# EAGLE board teensy36-test-harness (EAGLE 7.7.0)
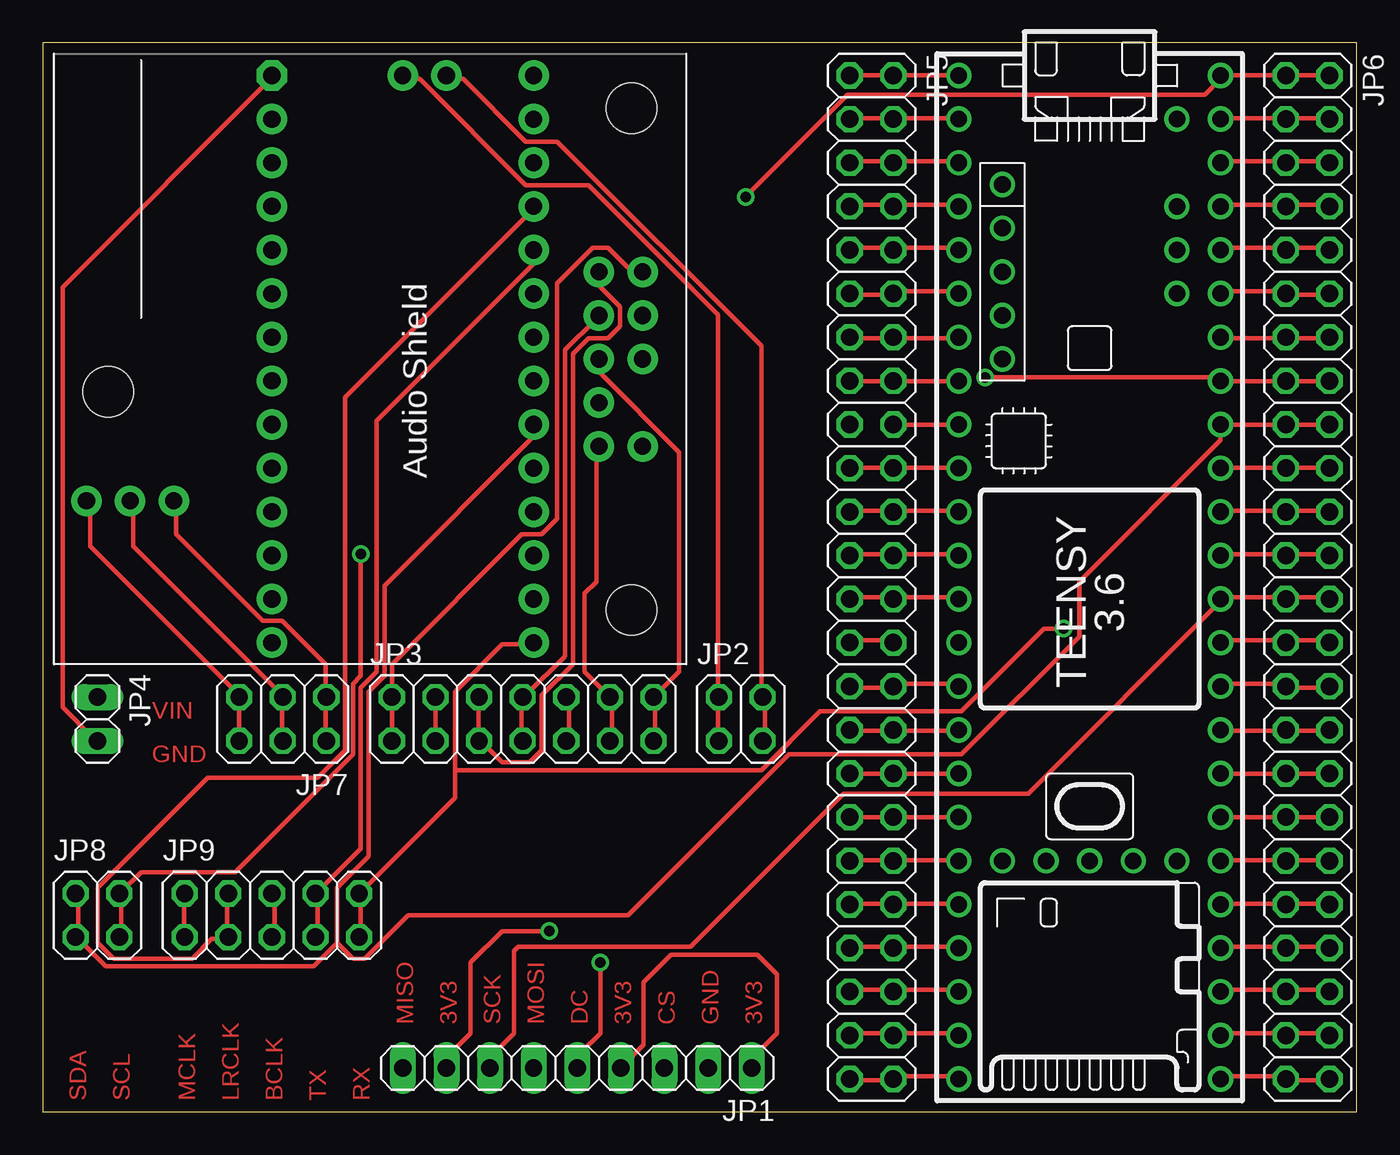
[diagram p0: board, top side]
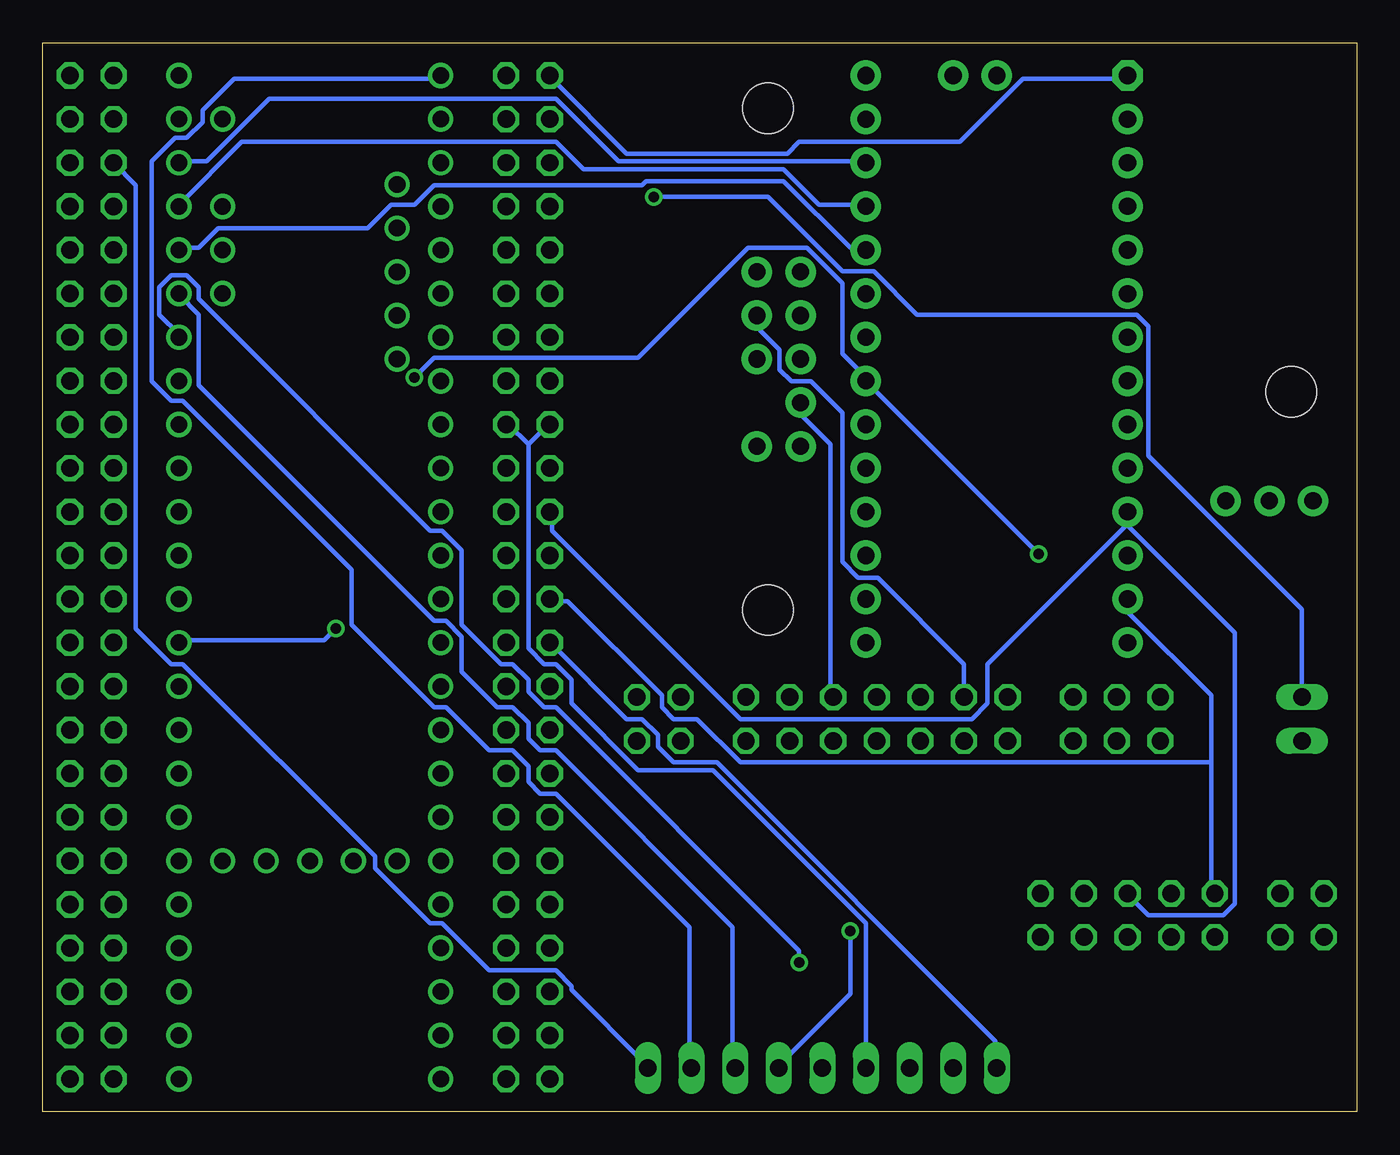
[diagram p1: board, bottom side, seen from below]

Size 76.5 x 62.22 mm. Coordinates in mm from the lower left corner, seen from the top.
Outline: 0,0 76.5,0 76.5,62.22 0,62.22 0,0
Copper layers (1*16): Top 0.035mm / dielectric 1.5mm / Bottom 0.035mm
Design rules "default": minimum track width 10mil, minimum drill 24mil, track to track 8mil, track to pad 8mil, pad to pad 8mil, via to via 8mil, smd to smd 8mil, copper to edge 40mil, drill to drill 8mil, minimum pad ring 10mil, minimum via ring 8mil, stop-mask expansion 4mil, vias tented up to drill 0mil, thermal gap 10mil

## Footprints (pad centres in the part's own frame; a part is rotated, then mirrored left to right if it is on the bottom)
1X09 = drill 1.016 long: 1 -10.16,0; 2 -7.62,0; 3 -5.08,0; 4 -2.54,0; 5 0,0; 6 2.54,0; 7 5.08,0; 8 7.62,0; 9 10.16,0
2X02 = drill 1.016 octagon: 1 -1.27,-1.27; 2 -1.27,1.27; 3 1.27,-1.27; 4 1.27,1.27
2X07 = drill 1.016 octagon: 1 -7.62,-1.27; 2 -7.62,1.27; 3 -5.08,-1.27; 4 -5.08,1.27; 5 -2.54,-1.27; 6 -2.54,1.27; 7 0,-1.27; 8 0,1.27; 9 2.54,-1.27; 10 2.54,1.27; 11 5.08,-1.27; 12 5.08,1.27; 13 7.62,-1.27; 14 7.62,1.27
1X02 = drill 1.016 long: 1 -1.27,0; 2 1.27,0
2X24 = drill 1.016 octagon: 1 -27.94,-1.27; 2 -27.94,1.27; 3 -25.4,-1.27; 4 -25.4,1.27; 5 -22.86,-1.27; 6 -22.86,1.27; 7 -20.32,-1.27; 8 -20.32,1.27; 9 -17.78,-1.27; 10 -17.78,1.27; 11 -15.24,-1.27; 12 -15.24,1.27; 13 -12.7,-1.27; 14 -12.7,1.27; 15 -10.16,-1.27; 16 -10.16,1.27; 17 -7.62,-1.27; 18 -7.62,1.27; 19 -5.08,-1.27; 20 -5.08,1.27; 21 -2.54,-1.27; 22 -2.54,1.27; 23 0,-1.27; 24 0,1.27; 25 2.54,-1.27; 26 2.54,1.27; 27 5.08,-1.27; 28 5.08,1.27; 29 7.62,-1.27; 30 7.62,1.27; 31 10.16,-1.27; 32 10.16,1.27; 33 12.7,-1.27; 34 12.7,1.27; 35 15.24,-1.27; 36 15.24,1.27; 37 17.78,-1.27; 38 17.78,1.27; 39 20.32,-1.27; 40 20.32,1.27; 41 22.86,-1.27; 42 22.86,1.27; 43 25.4,-1.27; 44 25.4,1.27; 45 27.94,-1.27; 46 27.94,1.27; 47 30.48,-1.27; 48 30.48,1.27
2X03 = drill 1.016 octagon: 1 -2.54,-1.27; 2 -2.54,1.27; 3 0,-1.27; 4 0,1.27; 5 2.54,-1.27; 6 2.54,1.27
2X05 = drill 1.016 octagon: 1 -5.08,-1.27; 2 -5.08,1.27; 3 -2.54,-1.27; 4 -2.54,1.27; 5 0,-1.27; 6 0,1.27; 7 2.54,-1.27; 8 2.54,1.27; 9 5.08,-1.27; 10 5.08,1.27
AUDIOSHIELD = drill 1 pad 1.778: 0 -13.97,-5.08; 1 -11.43,-5.08; 2 -8.89,-5.08; 3 -6.35,-5.08; 3V -11.43,10.16; 4 -3.81,-5.08; 5 -1.27,-5.08; 5V -16.51,10.16; 6 1.27,-5.08; 7 3.81,-5.08; 8 6.35,-5.08; 9 8.89,-5.08; 10 11.43,-5.08; 11 13.97,-5.08; 12 16.51,-5.08; 13 16.51,10.16; 14 13.97,10.16; 15 11.43,10.16; 16 8.89,10.16; 17 6.35,10.16; 18 3.81,10.16; 19 1.27,10.16; 20 -1.27,10.16; 21 -3.81,10.16; 22 -6.35,10.16; 23 -8.89,10.16; G -13.97,10.16; GND_MIC -16.51,2.54; INGND1 -5.08,16.51; INGND2 -2.54,16.51; INL -5.08,13.97; INR -2.54,13.97; MIC -16.51,5.08; OUTGND 2.54,13.97; OUTL 5.08,13.97; OUTR 0,13.97; UNUSED1 0,16.51; UNUSED2 5.08,16.51; VOL 8.255,-13.335; VOL_3.3V 8.255,-15.875; VOL_GND 8.255,-10.795 | drill 1 pad 1.778 octagon: GND -16.51,-5.08 | hole 2.921: 1.905,-14.605; -14.605,15.875; 14.605,15.875
TEENSY_3.5/3.6 = drill 0.965: 0/RX -25.4,-7.62; 1/TX -22.86,-7.62; 2 -20.32,-7.62; 3/CANTX -17.78,-7.62; 3V3 7.62,-7.62; 3V3_2 17.78,-2.54; 3V3_LO -22.86,7.62; 4/CANRX -15.24,-7.62; 5 -12.7,-7.62; 6 -10.16,-7.62; 7 -7.62,-7.62; 8 -5.08,-7.62; 9/CS -2.54,-7.62; 10/CS 0,-7.62; 11/MOSI 2.54,-7.62; 12/MISO 5.08,-7.62; 13/SCK 5.08,7.62; 14/A0 2.54,7.62; 15/A1 0,7.62; 16/A2 -2.54,7.62; 17/A3 -5.08,7.62; 18/A4/SDA -7.62,7.62; 19/A5/SCL -10.16,7.62; 20/A6 -12.7,7.62; 21/A7 -15.24,7.62; 21/DAC0 12.7,7.62; 22/A8 -17.78,7.62; 23/A9 -20.32,7.62; 24 10.16,-7.62; 25 12.7,-7.62; 26 15.24,-7.62; 27 17.78,-7.62; 28 20.32,-7.62; 29 22.86,-7.62; 30 25.4,-7.62; 31/A12 27.94,-7.62; 32/A13 30.48,-7.62; 33/A14 30.48,7.62; 34/A15 27.94,7.62; 35/A16 25.4,7.62; 36/A17 22.86,7.62; 37/A18 20.32,7.62; 38/A19 17.78,7.62; 39/A20 15.24,7.62; A10 -17.78,5.08; A11 -15.24,5.08; A22/DAC1 10.16,7.62; AGND -25.4,7.62; AREF -20.32,5.08; GND -27.94,-7.62; GND2 7.62,7.62; GND3 17.78,0; PROG 17.78,2.54; RESET 17.78,5.08; U5V -21.59,-5.08; UD+ -16.51,-5.08; UD- -19.05,-5.08; UGND1 -13.97,-5.08; UGND2 -11.43,-5.08; VBAT 17.78,-5.08; VIN -27.94,7.62; VUSB -25.4,5.08

## Placement (x,y rotation side)
JP1  [1X09]  31.11,2.54 180 top
JP2  [2X02]  40.64,22.86 0 top
JP3  [2X07]  27.94,22.86 0 top
JP4  [1X02]  3.17,22.86 270 top
JP5  [2X24]  48.26,32.39 270 top
JP6  [2X24]  73.66,32.39 270 top
JP7  [2X03]  13.97,22.86 180 top
JP8  [2X02]  3.17,11.43 0 top
JP9  [2X05]  13.34,11.43 0 top
U$2  [AUDIOSHIELD]  18.41,43.81 270 top
U$3  TEENSY_3.5/3.6  [TEENSY_3.5/3.6]  60.96,32.39 270 top

## Library data of the parts
JP1-JP9 = pinhead
U$2 = Teensy_Audioshield
U$3 = JC_Teensy356

## Nets
3V3: JP1.1 JP1.4 JP1.8 JP6.5 JP6.6 U$2.3V U$3.3V3_LO
BCLK: JP5.21 JP5.22 JP9.5 JP9.6 U$2.9 U$3.9/CS
GND: JP1.2 JP4.2 JP5.1 JP5.2 U$2.GND U$3.GND
LRCLK: JP6.7 JP6.8 JP9.3 JP9.4 U$2.23 U$3.23/A9
MCLK: JP5.25 JP5.26 JP9.1 JP9.2 U$2.11 U$3.11/MOSI
N$1: JP2.1 JP2.2 U$2.GND_MIC
N$2: JP4.1 JP6.1 JP6.2 U$3.VIN
N$3: JP7.1 JP7.2 U$2.VOL_GND
N$4: JP5.3 JP5.4 U$3.0/RX
N$5: JP5.5 JP5.6 U$3.1/TX
N$6: JP5.7 JP5.8 U$3.2
N$7: JP5.9 JP5.10 U$3.3/CANTX
N$8: JP5.11 JP5.12 U$3.4/CANRX
N$9: JP5.13 JP5.14 U$3.5
N$10: JP2.3 JP2.4 U$2.MIC
N$11: JP3.1 JP3.2 U$2.INGND1
N$12: JP3.3 JP3.4 U$2.INGND2
N$13: JP3.5 JP3.6 U$2.INL
N$14: JP3.7 JP3.8 U$2.INR
N$15: JP3.9 JP3.10 U$2.OUTGND
N$16: JP3.11 JP3.12 U$2.OUTL
N$17: JP3.13 JP3.14 U$2.OUTR
N$18: JP5.15 JP5.16 U$3.6
N$19: JP7.3 JP7.4 U$2.VOL
N$20: JP5.19 JP5.20 U$3.8
N$21: JP7.5 JP7.6 U$2.VOL_3.3V
N$22: JP5.23 JP5.24 U$3.10/CS
N$25: JP5.29 JP5.30 U$3.3V3
N$26: JP5.31 JP5.32 U$3.24
N$27: JP5.33 JP5.34 U$3.25
N$28: JP5.35 JP5.36 U$3.26
N$29: JP5.37 JP5.38 U$3.27
N$30: JP5.39 JP5.40 U$3.28
N$31: JP5.41 JP5.42 U$3.29
N$32: JP5.43 JP5.44 U$3.30
N$33: JP5.45 JP5.46 U$3.31/A12
N$34: JP5.47 JP5.48 U$3.32/A13
N$36: JP6.3 JP6.4 U$3.AGND
N$44: JP6.19 JP6.20 U$3.17/A3
N$45: JP6.21 JP6.22 U$3.16/A2
N$46: JP6.23 JP6.24 U$3.15/A1
N$49: JP6.29 JP6.30 U$3.GND2
N$50: JP6.31 JP6.32 U$3.A22/DAC1
N$51: JP6.33 JP6.34 U$3.21/DAC0
N$52: JP6.35 JP6.36 U$3.39/A20
N$53: JP6.37 JP6.38 U$3.38/A19
N$54: JP6.39 JP6.40 U$3.37/A18
N$55: JP6.41 JP6.42 U$3.36/A17
N$56: JP6.43 JP6.44 U$3.35/A16
N$57: JP6.45 JP6.46 U$3.34/A15
N$58: JP6.47 JP6.48 U$3.33/A14
RX: JP6.27 JP6.28 JP9.9 JP9.10 U$2.13 U$3.13/SCK
SCL: JP6.15 JP6.16 JP8.3 JP8.4 U$2.19 U$3.19/A5/SCL
SDA: JP6.17 JP6.18 JP8.1 JP8.2 U$2.18 U$3.18/A4/SDA
TFT_CS: JP1.3 JP6.11 JP6.12 U$3.21/A7
TFT_DC: JP1.5 JP6.13 JP6.14 U$3.20/A6
TFT_MISO: JP1.9 JP5.27 JP5.28
TFT_MOSI: JP1.6 JP5.17 JP5.18 U$3.7
TFT_SCK: JP1.7 JP6.25 JP6.26 U$3.14/A0
TX: JP6.9 JP6.10 JP9.7 JP9.8 U$2.22 U$3.22/A8

## Tracks (layer width: path | path; a pad name or v marks a point on that pad's centre or on a via)
3V3  (via drill 0.61)
  Top 0.254: v29.49,10.52 26.75,10.52 24.92,8.69 24.92,4.57 23.55,3.2 23.55,2.74 JP1.8 | JP1.1 41.38,2.74 41.38,3.2 42.75,4.57 42.75,8 41.6,9.14 36.58,9.14 34.98,7.54 34.98,3.89 33.83,2.74 JP1.4 | U$3.3V3_LO 68.58,55.32 72.24,55.32 JP6.5 72.47,55.32 74.75,55.32 JP6.6
  Bottom 0.254: v29.49,10.52 29.49,6.86 33.6,2.74 JP1.4 | U$2.3V 28.57,55.32 42.98,55.32 46.63,58.98 63.32,58.98 66.98,55.32 68.58,55.32 U$3.3V3_LO | JP6.5 71.09,53.95 71.09,28.12 69.04,26.06 68.35,26.06 57.15,14.86 57.15,14.17 53.95,10.97 53.26,10.97 50.52,8.23 46.63,8.23 45.72,7.32 45.72,7.09 41.38,2.74 JP1.1
BCLK
  Top 0.254: U$3.9/CS 53.26,34.98 49.61,34.98 JP5.22 49.38,34.98 47.09,34.98 JP5.21 | JP9.5 13.49,10.29 13.49,12.57 JP9.6
  Bottom 0.254: 13.26,34.29 13.26,34.06 7.09,27.89 7.09,12.12 7.77,11.43 12.12,11.43 13.26,12.57 JP9.6 | 13.26,34.29 13.26,34.75 U$2.9 13.26,34.29 | 13.26,34.29 21.49,26.06 21.49,23.77 22.4,22.86 35.89,22.86 46.86,33.83 46.86,34.75 JP5.21
GND
  Top 0.254: JP4.2 2.97,21.72 1.14,23.55 1.14,48.01 13.26,60.12 U$2.GND | U$3.GND 53.26,60.35 49.61,60.35 JP5.2 49.38,60.35 47.09,60.35 JP5.1
  Bottom 0.254: JP1.2 38.86,2.74 38.86,10.74 46.63,18.52 47.55,18.52 48.23,19.2 48.23,20.12 49.15,21.03 50.52,21.03 53.03,23.55 53.72,23.55 58.52,28.35 58.52,31.55 68.35,41.38 69.04,41.38 70.18,42.52 70.18,55.32 68.81,56.69 68.12,56.69 67.21,57.61 67.21,58.29 65.38,60.12 53.49,60.12 U$3.GND | U$2.GND 13.49,60.12 19.43,60.12 23.09,56.46 32.46,56.46 33.15,55.78 42.52,55.78 46.86,60.12 JP5.1
LRCLK
  Top 0.254: JP9.4 10.74,12.57 10.74,10.29 JP9.3 10.74,10.06 9.83,10.06 8.69,8.91 4.12,8.91 3.2,9.83 3.2,13.03 9.6,19.43 16,19.43 17.6,21.03 17.6,41.61 28.57,52.58 U$2.23 | U$3.23/A9 68.58,52.81 72.24,52.81 JP6.7 72.47,52.81 74.75,52.81 JP6.8
  Bottom 0.254: U$2.23 28.57,52.81 31.32,52.81 33.38,54.86 45.03,54.86 46.63,56.46 64.92,56.46 68.58,52.81 U$3.23/A9
MCLK
  Top 0.254: U$3.11/MOSI 53.26,29.95 49.61,29.95 JP5.26 49.38,29.95 47.09,29.95 JP5.25 | JP9.1 8.23,10.29 8.23,12.57 JP9.2
  Bottom 0.254: 8.46,20.35 8.46,12.8 JP9.2 | 8.46,20.35 8.46,24.23 13.26,29.03 13.26,29.72 U$2.11 | 8.46,20.35 35.89,20.35 38.41,22.86 39.78,22.86 40.46,23.55 40.46,24.23 45.95,29.72 46.86,29.72 JP5.25
N$1
  Top 0.254: JP2.1 39.32,21.72 39.32,24 JP2.2 39.32,24.23 39.32,46.41 31.77,53.95 28.12,53.95 21.95,60.12 21.03,60.12 U$2.GND_MIC
N$2  (via drill 0.61)
  Top 0.254: v40.92,53.26 46.86,59.21 67.67,59.21 68.58,60.12 U$3.VIN 68.58,60.35 72.24,60.35 JP6.1 72.47,60.35 74.75,60.35 JP6.2
  Bottom 0.254: v40.92,53.26 34.29,53.26 29.95,48.92 28.12,48.92 25.6,46.41 12.8,46.41 12.12,45.72 12.12,38.18 3.2,29.26 3.2,24.23 JP4.1
N$3
  Top 0.254: JP7.2 16.46,21.72 16.46,24 JP7.1 16.46,24.23 16.46,26.06 13.95,28.57 12.8,28.57 7.77,33.6 7.77,35.43 U$2.VOL_GND
N$4
  Top 0.254: U$3.0/RX 53.26,57.84 49.61,57.84 JP5.4 49.38,57.84 47.09,57.84 JP5.3
N$5
  Top 0.254: U$3.1/TX 53.26,55.32 49.61,55.32 JP5.6 49.38,55.32 47.09,55.32 JP5.5
N$6
  Top 0.254: U$3.2 53.26,52.81 49.61,52.81 JP5.8 49.38,52.81 47.09,52.81 JP5.7
N$7
  Top 0.254: U$3.3/CANTX 53.26,50.29 49.61,50.29 JP5.10 49.38,50.29 47.09,50.29 JP5.9
N$8
  Top 0.254: U$3.4/CANRX 53.26,47.78 49.61,47.78 JP5.12 49.38,47.55 47.09,47.55 JP5.11
N$9
  Top 0.254: U$3.5 53.26,45.03 49.61,45.03 JP5.14 49.38,45.03 47.09,45.03 JP5.13
N$10
  Top 0.254: JP2.3 42.06,21.72 42.06,24 JP2.4 41.83,24.23 41.83,44.58 29.95,56.46 28.12,56.46 24.46,60.12 23.55,60.12 U$2.MIC
N$11
  Top 0.254: JP3.1 20.34,21.72 20.34,24 JP3.2 20.34,24.23 20.34,26.06 27.89,33.6 29.03,33.6 29.95,34.52 29.95,48.23 32,50.29 32.92,50.29 34.29,48.92 34.75,48.92 U$2.INGND1
N$12
  Top 0.254: JP3.4 JP3.3
  Bottom 0.254: JP3.4 22.86,26.06 27.89,31.09 29.03,31.09 29.95,32 29.95,40.69 31.77,42.52 32.92,42.52 33.6,43.2 33.6,44.35 34.75,45.49 34.75,46.18 U$2.INGND2
N$13
  Top 0.254: JP3.6 25.38,24 25.38,21.72 JP3.5 25.6,21.49 26.75,20.35 28.35,20.35 29.03,21.03 29.03,24.23 30.86,26.06 30.86,44.12 31.77,45.03 32.92,45.03 33.6,45.72 33.6,46.86 32.46,48.01 32.46,48.69 U$2.INL
N$14
  Top 0.254: JP3.7 27.89,21.72 27.89,24 JP3.8 28.12,24.23 30.4,26.52 30.4,44.35 32.23,46.18 U$2.INR
N$15
  Top 0.254: JP3.9 30.63,21.72 30.63,24 JP3.10
  Bottom 0.254: U$2.OUTGND 32.23,41.15 32.23,40.46 30.63,38.86 30.63,24.23 JP3.10
N$16
  Top 0.254: JP3.11 33.15,21.72 33.15,24 JP3.12 31.55,25.6 31.55,30.18 32.23,30.86 32.23,38.63 U$2.OUTL
N$17
  Top 0.254: JP3.13 35.66,21.72 35.66,24 JP3.14 37.03,25.6 37.03,38.41 32.46,42.98 32.46,43.66 U$2.OUTR
N$18
  Top 0.254: U$3.6 53.26,42.52 49.61,42.52 JP5.16 49.38,42.52 47.09,42.52 JP5.15
N$19
  Top 0.254: JP7.4 13.95,21.72 13.95,24 JP7.3 13.95,24.23 5.26,32.92 5.26,35.43 U$2.VOL
N$20
  Top 0.254: U$3.8 53.26,37.49 49.61,37.49 JP5.20 49.38,37.49 47.09,37.49 JP5.19
N$21
  Top 0.254: JP7.6 JP7.5 11.43,24.23 2.74,32.92 2.74,35.43 U$2.VOL_3.3V
N$22
  Top 0.254: U$3.10/CS 53.26,32.46 49.61,32.46 JP5.24 49.38,32.46 47.09,32.46 JP5.23
N$25
  Top 0.254: U$3.3V3 53.26,24.92 49.61,24.92 JP5.30 49.38,24.69 47.09,24.69 JP5.29
N$26
  Top 0.254: U$3.24 53.26,22.17 49.61,22.17 JP5.32 49.38,22.17 47.09,22.17 JP5.31
N$27
  Top 0.254: U$3.25 53.26,19.66 49.61,19.66 JP5.34 49.38,19.66 47.09,19.66 JP5.33
N$28
  Top 0.254: U$3.26 JP5.36 JP5.35
N$29
  Top 0.254: U$3.27 53.26,14.63 49.61,14.63 JP5.38 49.38,14.63 47.09,14.63 JP5.37
N$30
  Top 0.254: U$3.28 53.26,12.12 49.61,12.12 JP5.40 49.38,12.12 47.09,12.12 JP5.39
N$31
  Top 0.254: U$3.29 53.26,9.6 49.61,9.6 JP5.42 49.38,9.6 47.09,9.6 JP5.41
N$32
  Top 0.254: U$3.30 53.26,7.09 49.61,7.09 JP5.44 49.38,7.09 47.09,7.09 JP5.43
N$33
  Top 0.254: U$3.31/A12 53.26,4.57 49.61,4.57 JP5.46 49.38,4.57 47.09,4.57 JP5.45
N$34
  Top 0.254: U$3.32/A13 53.26,2.06 49.61,2.06 JP5.48 49.38,1.83 47.09,1.83 JP5.47
N$36
  Top 0.254: U$3.AGND 68.58,57.84 72.24,57.84 JP6.3 72.47,57.84 74.75,57.84 JP6.4
N$44
  Top 0.254: U$3.17/A3 68.58,37.49 72.24,37.49 JP6.19 72.47,37.49 74.75,37.49 JP6.20
N$45
  Top 0.254: U$3.16/A2 68.58,34.98 72.24,34.98 JP6.21 72.47,34.98 74.75,34.98 JP6.22
N$46
  Top 0.254: U$3.15/A1 68.58,32.46 72.24,32.46 JP6.23 72.47,32.46 74.75,32.46 JP6.24
N$49
  Top 0.254: U$3.GND2 68.58,24.92 72.24,24.92 JP6.29 72.47,24.69 74.75,24.69 JP6.30
N$50
  Top 0.254: U$3.A22/DAC1 68.58,22.17 72.24,22.17 JP6.31 72.47,22.17 74.75,22.17 JP6.32
N$51
  Top 0.254: U$3.21/DAC0 68.58,19.66 72.24,19.66 JP6.33 72.47,19.66 74.75,19.66 JP6.34
N$52
  Top 0.254: U$3.39/A20 JP6.35 JP6.36
N$53
  Top 0.254: U$3.38/A19 68.58,14.63 72.24,14.63 JP6.37 72.47,14.63 74.75,14.63 JP6.38
N$54
  Top 0.254: U$3.37/A18 68.58,12.12 72.24,12.12 JP6.39 72.47,12.12 74.75,12.12 JP6.40
N$55
  Top 0.254: U$3.36/A17 68.58,9.6 72.24,9.6 JP6.41 72.47,9.6 74.75,9.6 JP6.42
N$56
  Top 0.254: U$3.35/A16 68.58,7.09 72.24,7.09 JP6.43 72.47,7.09 74.75,7.09 JP6.44
N$57
  Top 0.254: U$3.34/A15 68.58,4.57 72.24,4.57 JP6.45 72.47,4.57 74.75,4.57 JP6.46
N$58
  Top 0.254: U$3.33/A14 68.58,2.06 72.24,2.06 JP6.47 72.47,1.83 74.75,1.83 JP6.48
RX  (via drill 0.61)
  Top 0.254: U$3.13/SCK 68.58,27.43 72.24,27.43 JP6.27 72.47,27.43 74.75,27.43 JP6.28 | JP9.9 18.52,10.29 18.52,12.57 JP9.10 24,18.29 24,19.89 | 24,19.89 24,24.46 26.75,27.2 28.57,27.2 U$2.13 | v59.44,28.12 58.29,28.12 53.49,23.32 45.26,23.32 41.83,19.89 24,19.89
  Bottom 0.254: v59.44,28.12 60.12,27.43 68.58,27.43 U$3.13/SCK
SCL  (via drill 0.61)
  Top 0.254: JP6.16 74.75,42.52 72.47,42.52 JP6.15 72.24,42.52 68.58,42.52 U$3.19/A5/SCL 68.58,42.75 v54.86,42.75 | JP8.3 4.57,10.29 4.57,12.57 JP8.4 4.57,12.8 5.71,13.95 11.2,13.95 18.06,20.8 18.06,24.92 18.52,25.38 v18.52,32.46
  Bottom 0.254: v18.52,32.46 28.57,42.52 U$2.19 28.57,42.75 29.95,44.12 29.95,48.23 32,50.29 35.43,50.29 41.83,43.89 53.72,43.89 v54.86,42.75
SDA
  Top 0.254: JP6.18 JP6.17 U$3.18/A4/SDA 68.58,39.09 60.35,30.86 60.35,27.66 53.49,20.8 43.43,20.8 34.06,11.43 21.26,11.43 18.75,8.91 18.06,8.91 17.14,9.83 | JP8.2 2.06,12.57 2.06,10.29 JP8.1 2.06,10.06 3.66,8.46 15.77,8.46 17.14,9.83 | U$2.18 28.57,39.32 19.89,30.63 19.89,25.38 18.97,24.46 18.97,14.86 17.14,13.03 17.14,9.83
TFT_CS
  Top 0.254: U$3.21/A7 68.58,47.78 72.24,47.78 JP6.11 72.47,47.55 74.75,47.55 JP6.12
  Bottom 0.254: JP1.3 36.35,2.74 36.35,10.74 46.63,21.03 47.55,21.03 48.23,21.72 48.23,22.63 49.15,23.55 50.06,23.55 52.12,25.6 52.12,27.66 53.03,28.57 53.72,28.57 67.44,42.29 67.44,46.41 68.58,47.55 U$3.21/A7
TFT_DC  (via drill 0.61)
  Top 0.254: U$3.20/A6 68.58,45.03 72.24,45.03 JP6.13 72.47,45.03 74.75,45.03 JP6.14 | v32.46,8.69 32.46,4.57 31.32,3.43 31.32,2.74 JP1.5
  Bottom 0.254: v32.46,8.69 32.46,9.37 46.63,23.55 47.32,23.55 48.23,24.46 48.23,25.15 49.15,26.06 49.84,26.06 52.12,28.35 52.12,32.69 53.26,33.83 53.95,33.83 67.44,47.32 67.44,48.01 68.12,48.69 69.04,48.69 69.72,48.01 69.72,46.41 68.58,45.26 U$3.20/A6
TFT_MISO
  Top 0.254: JP5.28 49.38,27.43 47.09,27.43 JP5.27
  Bottom 0.254: JP1.9 21.03,2.74 21.03,4.12 37.26,20.35 39.78,20.35 40.69,21.26 40.69,21.95 41.6,22.86 42.52,22.86 46.86,27.2 JP5.27
TFT_MOSI
  Top 0.254: JP5.18 U$3.7
  Bottom 0.254: JP1.6 28.57,10.97 37.49,19.89 41.83,19.89 45.72,23.77 45.72,25.15 46.63,26.06 47.32,26.06 48.23,26.97 48.23,38.86 | 48.23,38.86 47.09,40 JP5.17 | 48.23,38.86 49.38,40 JP5.18
TFT_SCK
  Top 0.254: JP1.7 26.06,2.74 26.06,3.2 27.43,4.57 27.43,9.37 27.66,9.6 37.72,9.6 46.63,18.52 57.38,18.52 68.58,29.72 U$3.14/A0 68.58,29.95 72.24,29.95 JP6.25 72.47,29.95 74.75,29.95 JP6.26
TX
  Top 0.254: U$3.22/A8 68.58,50.29 72.24,50.29 JP6.9 72.47,50.29 74.75,50.29 JP6.10 | JP9.7 16,10.29 16,12.57 JP9.8 16,12.8 18.52,15.32 18.52,24.69 19.43,25.6 19.43,40.23 28.57,49.38 U$2.22
  Bottom 0.254: U$3.22/A8 68.58,50.29 67.44,50.29 66.29,51.44 57.61,51.44 56.24,52.81 54.86,52.81 53.72,53.95 41.6,53.95 41.38,54.18 33.38,54.18 29.49,50.29 28.57,50.29 U$2.22

## Text on the board
Top: VIN | GND | MISO | 3V3 | SCK | MOSI | DC | 3V3 | CS | GND | 3V3 | SDA | SCL | MCLK | LRCLK | BCLK | TX | RX